# Altium PCB L50T-MAU.PcbDoc (part 1 of 2)
Units mil, origin at the board's own origin, x right, y up, seen from the top; angles counter-clockwise.
Board outline 6702.94 x 9262 mil, 2 copper layers (Top Layer, Bottom Layer); 116 components, 86 nets, 377 pads, 320 vias.
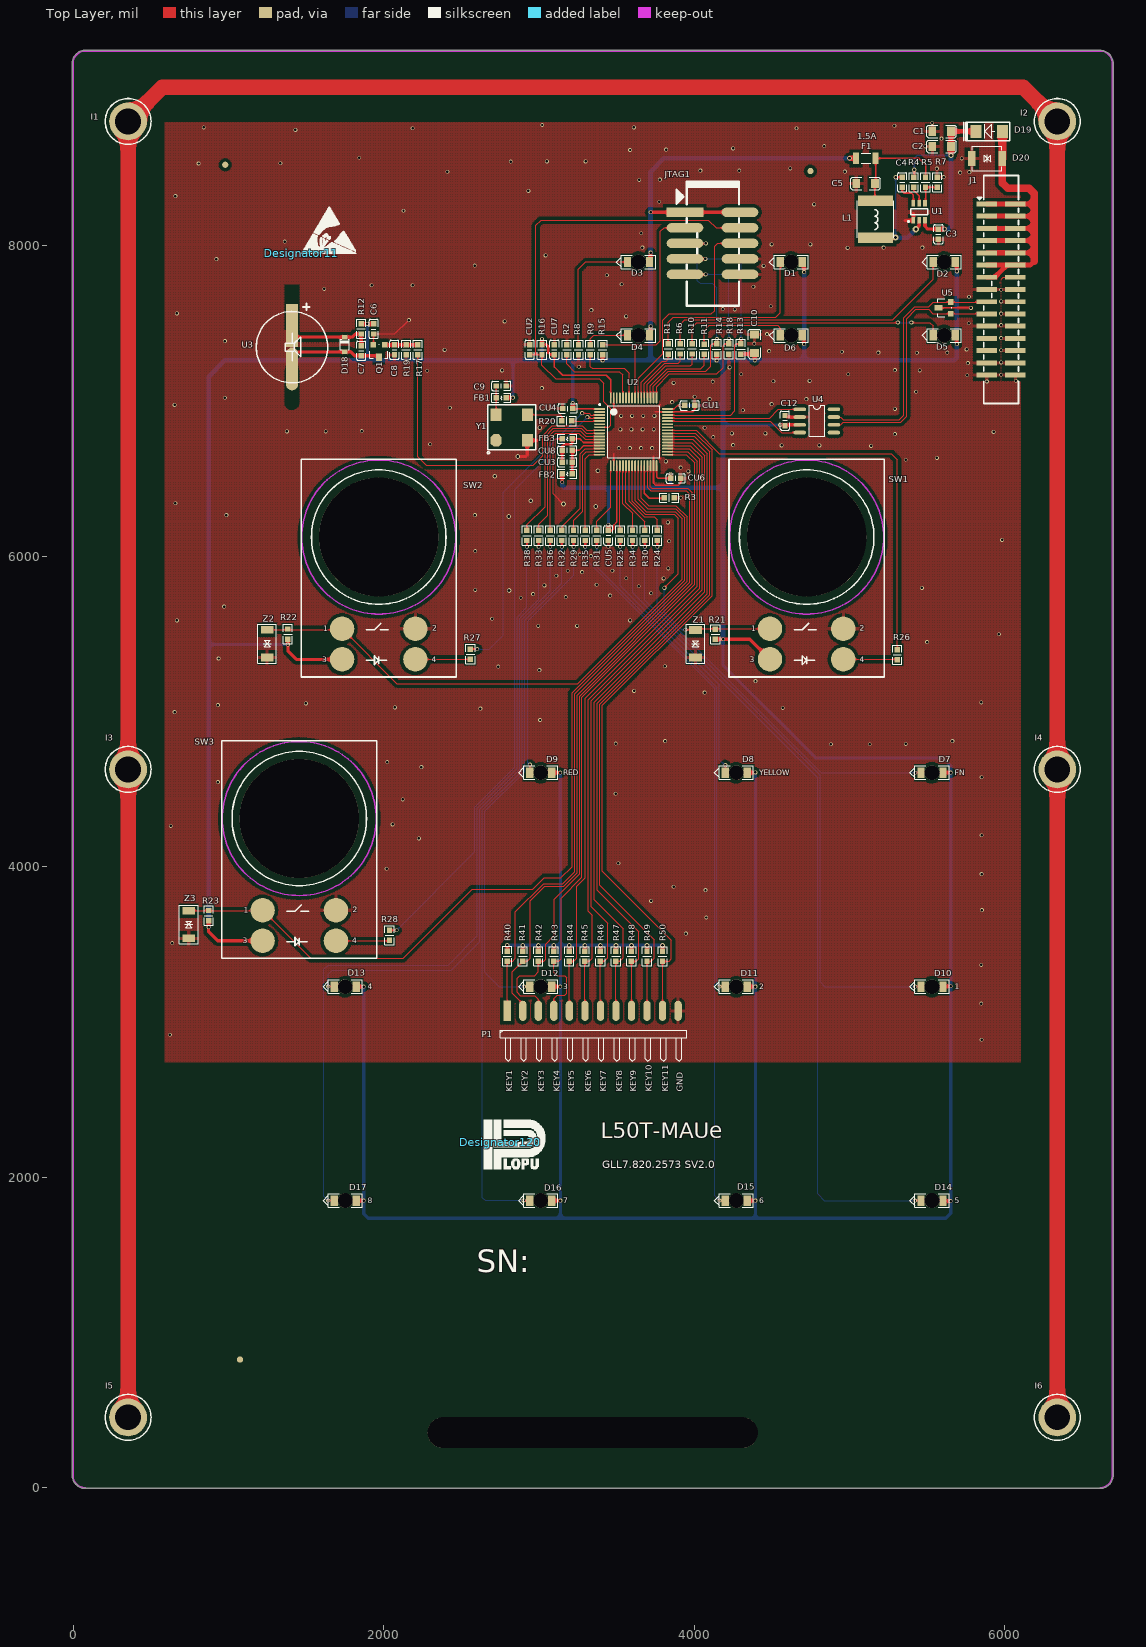
[diagram p0: Top Layer view]
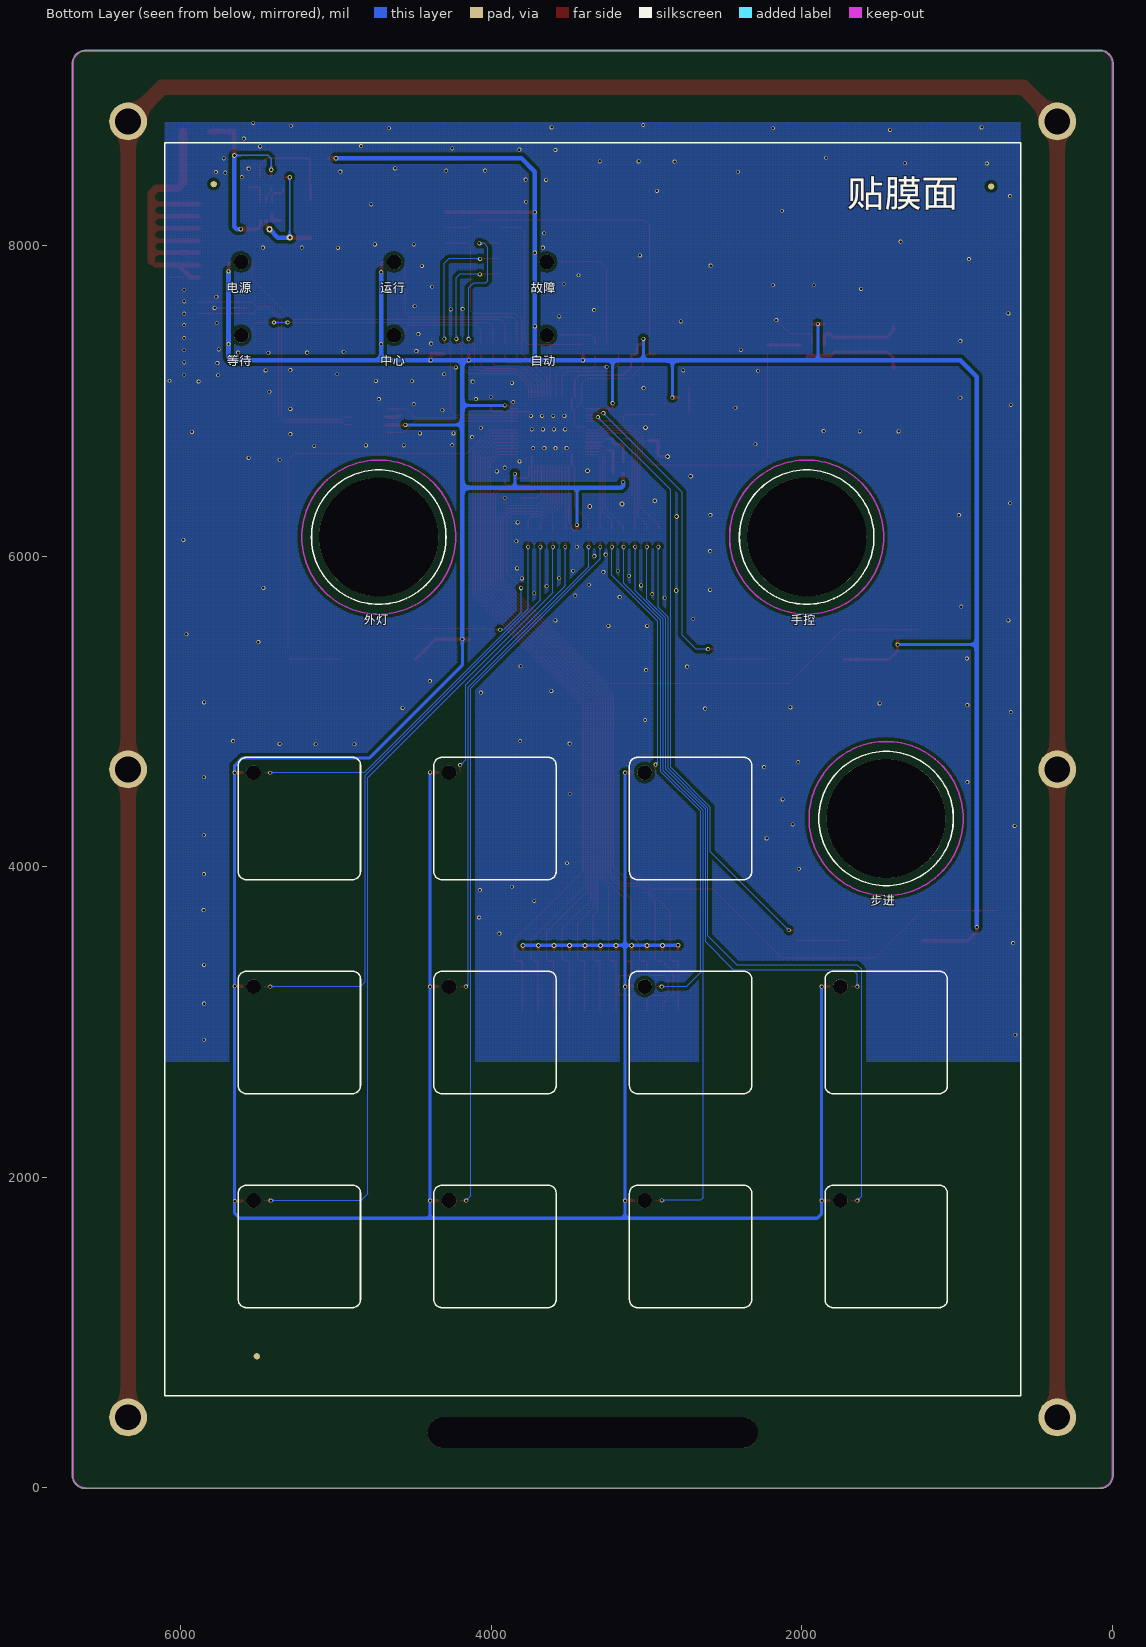
[diagram p1: Bottom Layer view, seen from below]

## Layer stack, top to bottom
Top Solder: solder mask 0.4, Solder Resist, Dk 3.5
Top Layer: signal copper 1.4
Dielectric1: dielectric 12.6, FR-4, Dk 4.8
Bottom Layer: signal copper 1.4
Bottom Solder: solder mask 0.4, Solder Resist, Dk 3.5

## Board outline
-5.01,78.74 ccw(c78.74,78.74) 78.74,-5.01 6614.17,-5.01 ccw(c6614.17,78.74) 6697.93,78.74 6697.93,9173.23 ccw(c6692.91,9173.23) 6697.93,9173.26 cw(c6614.17,9173.23) 6697.93,9173.23 cw(c6692.91,9173.23) 6697.93,9173.23 6697.93,9173.26 ccw(c6614.17,9173.23) 6614.17,9256.98 78.74,9256.98 ccw(c78.74,9173.23) -5.01,9173.23

## Design rules (kind name [scope] priority, off if disabled: settings)
Clearance Clearance_U2 [InComponent('U2')] p1: gap=7
Clearance Clearance_U3 [InComponent('U3')] p2: gap=7
Clearance Clearance_poly [InPolygon] p3: gap=20
Clearance [All] p4: gap=8
ComponentClearance [All] p1: gap=6 collisioncheckmode=3 verticalgap=6 showdistances=FALSE
DiffPairsRouting [All] p1: maxlimit=10 minlimit=10 mostfreqgap=10 toplayer_minwidth=8 toplayer_maxwidth=15 toplayer_prefwidth=15 bottomlayer_minwidth=8 bottomlayer_maxwidth=15 bottomlayer_prefwidth=15 maxuncoupledlength=500
HoleSize [All] p1: absolutevalues=TRUE maxlimit=3000 minlimit=1 maxpercent=80.000 minpercent=20.000
HoleToHoleClearance [All] p1: gap=6 allowstackedmicrovias=TRUE
MinimumSolderMaskSliver [All] p1: minsoldermaskwidth=0
PlaneConnect [InNet('V3.3')] p1: planeconnectstyle=Direct reliefexpansion=20 reliefentries=4 reliefconductorwidth=10 reliefairgap=10
PlaneConnect PlaneConnect_DGND [All] p2: planeconnectstyle=Relief reliefexpansion=20 reliefentries=4 reliefconductorwidth=20 reliefairgap=20
PolygonConnect PolygonConnect_via [isvia] p1: connectstyle=Direct reliefconductorwidth=10 reliefentries=4 polygonreliefangle="90 Angle" airgapwidth=10
PolygonConnect [All] p2: connectstyle=Relief reliefconductorwidth=20 reliefentries=4 polygonreliefangle="90 Angle" airgapwidth=20
RoutingVias [All] p1: holewidth=28 width=50 viastyle="Through Hole" minholewidth=16 minwidth=25 maxholewidth=30 maxwidth=60
SilkToSilkClearance [All] p1: silktosilkclearance=0
SilkToSolderMaskClearance [IsPad] p1: minsilkscreentomaskgap=0 clearancetoexposedcopper=TRUE
SolderMaskExpansion [All] p1: expansion=4
Width [All] p1: maxlimit=400 minlimit=6 preferedwidth=10
22 further rules are at their usual default settings.

## Classes and differential pairs
differential pair DifferentialPair_STM32CAN: +CAN_R -CAN_T
differential pair DifferentialPair_CAN: +CAN0_H -CAN0_L

## Components (designator, comment, footprint, x,y, rotation, side; value= is the part's Value field where it differs from the comment)
C1 "1206-16V-10UF-X5R-K" 1206C#1 5534,8735 r0 top
C2 "1206-16V-10UF-X5R-K" 1206C#2 5594,8637 r0 top
C3 "0603-50V-0.1UF-X7R-K" 0603C#1 5573,8073 r270 top
C4 "0603-50V-0.1UF-X7R-K" 0603C#1 5340,8407.5 r270 top
C5 "1206-10V-47UF-Y5V-M" 1206C#2 5104,8399 r0 top
C6 "0603-50V-0.1UF-X7R-K" 0603C#2 1935,7495 r270 top
C7 "0603-50V-0.1UF-X7R-K" 0603C#2 1855,7355 r270 top
C8 "0603-50V-0.1UF-X7R-K" 0603C#2 2070,7295 r90 top
C9 "0603-50V-1NF-X7R-K" 0603c 2725,7095 r0 top
C10 "1206-16V-10UF-X5R-K" 1206C#2 4389,7367 r270 top
C12 "0603-50V-0.1UF-X7R-K" 0603C#2 4585,6840 r90 top
CU1 "0603-50V-0.1UF-X7R-K" 0603C#2 4002.91,6970 r180 top
CU2 "0603-50V-0.1UF-X7R-K" 0603C#2 2939.91,7362 r270 top
CU3 "0603-50V-0.01UF-X7R-K" 0603C#2 3215,6605 r180 top
CU4 "0603-50V-0.1UF-X7R-K" 0603C#2 3152.91,6950 r0 top
CU5 "0603-50V-0.1UF-X7R-K" 0603C#2 3447.91,6100 r90 top
CU6 "0603-50V-0.1UF-X7R-K" 0603C#2 3912.91,6500 r180 top
CU7 "0603-50V-0.1UF-X7R-K" 0603C#2 3099.91,7362 r270 top
CU8 "0603-50V-0.1UF-X7R-K" 0603C#2 3215,6680 r180 top
D1 "Blue" 1206LED-B 4625.98,7893.7 r0 top locked
D2 "Red" 1206LED-B 5610.24,7893.7 r0 top locked
D3 "Green" 1206LED-B 3641.73,7893.7 r0 top locked
D4 "Red" 1206LED-B 3641.73,7421.26 r0 top locked
D5 "Blue" 1206LED-B 5610.24,7421.26 r0 top locked
D6 "Blue" 1206LED-B 4625.98,7421.26 r0 top locked
D7 "Blue" LED-KEY 5531.5,4604.72 r180 bottom locked
D8 "Blue" LED-KEY 4271.65,4604.72 r180 bottom locked
D9 "Blue" LED-KEY 3011.81,4604.72 r180 bottom locked
D10 "Blue" LED-KEY 5531.5,3226.77 r180 bottom locked
D11 "Blue" LED-KEY 4271.65,3226.77 r180 bottom locked
D12 "Blue" LED-KEY 3011.81,3226.77 r180 bottom locked
D13 "Blue" LED-KEY 1751.97,3226.77 r180 bottom locked
D14 "Blue" LED-KEY 5531.5,1848.82 r180 bottom locked
D15 "Blue" LED-KEY 4271.65,1848.82 r180 bottom locked
D16 "Blue" LED-KEY 3011.81,1848.82 r180 bottom locked
D17 "Blue" LED-KEY 1751.97,1848.82 r180 bottom locked
D18 "1N4148" SOD-323 1750,7410 r270 top
D19 "SS14" SMA 5900,8735 r180 top
D20 "SMBJ15CA" SMB-TVS#1 5788,8560 r0 top
Designator11 "Comment" ESD-9 1470,7949 r0 top
Designator120 "Comment" LOPU_LOGO 2751,2225 r0 top
F1 "贴片1206/nSMD035（台湾陆海）" 1206F 5106,8562 r180 top
FB1 "0603 31@100MHz" 0603L 2725,7020 r0 top
FB2 "0603 31@100MHz" 0603L 3150,6530 r0 top
FB3 "0603 31@100MHz" 0603L 3150,6755 r0 top
I1 "PCB-M3" PADS_M3 354.33,8799.21 r0 top locked
I2 "PCB-M3" PADS_M3 6338.58,8799.21 r0 top
I3 "PCB-M3" PADS_M3 354.33,4625.98 r0 top locked
I4 "PCB-M3" PADS_M3 6338.58,4625.98 r0 top locked
I5 "PCB-M3" PADS_M3 354.33,452.76 r0 top locked
I6 "PCB-M3" PADS_M3 6338.58,452.76 r0 top locked
J1 "Header15x2_T" IDC-30-2.0T 5976.5,7716.52 r0 top locked
JTAG1 "Header 5X2" IDC-10-SMT 4118,8014 r0 top
L1 "贴片6045功率电感 3.3uH 5A" L-6045 5167,8169 r180 top
P1 "Header 12H" XPHD101-12-A01 3346.46,3070.87 r0 top locked
Q1 "8050" SOT-23 1932,7359.46 r0 top
R1 "0603-680-1%" 0603R#1 3832.91,7300.91 r90 top
R2 "0603-10K-1%" 0603R#1 3179.91,7362 r270 top
R3 "0603-10K-1%" 0603R#1 3872.91,6375 r180 top
R4 "0603-10K-1%" 0603R#2 5415,8407.5 r90 top
R5 "0603-33.2K-1%" 0603R#1 5490,8440 r270 top
R6 "0603-680-1%" 0603R#1 3910,7301 r90 top
R7 "0603-10K-1%" 0603R#2 5565,8407.5 r90 top
R8 "0603-680-1%" 0603R#1 3255,7297 r90 top
R9 "0603-680-1%" 0603R#1 3331,7297 r90 top
R10 "0603-680-1%" 0603R#1 3987,7301 r90 top
R11 "0603-680-1%" 0603R#1 4064,7300 r90 top
R12 "0603-0-1%" 0603R#1 1855,7430 r90 top
R13 "0603-10K-1%" 0603R#1 4300.91,7365.91 r270 top
R14 "0603-10K-1%" 0603R#1 4144.91,7365.91 r270 top
R15 "0603-10K-1%" 0603R#1 3409.91,7362 r270 top
R16 "0603-10K-1%" 0603R#1 3019.91,7297 r90 top
R17 "0603-4.7K-1%" 0603R#1 2220,7295 r90 top
R18 "0603-10K-1%" 0603R#1 4223.54,7300.91 r90 top
R19 "0603-3.3K-1%" 0603R#1 2145,7295 r90 top
R20 "0603-22-1%" 0603R#1 3212.91,6870 r180 top
R21 "0603-680-1%" 0603R#1 4136.91,5529 r270 top
R22 "0603-680-1%" 0603R#1 1382.91,5530 r270 top
R23 "0603-680-1%" 0603R#1 872.91,3717 r270 top
R24 "0603-680-1%" 0603R#1 3762.91,6165 r270 top
R25 "0603-680-1%" 0603R#1 3522.91,6165 r270 top
R26 "0603-680-1%" 0603R#1 5307.91,5397 r270 top
R27 "0603-680-1%" 0603R#1 2558.91,5401 r270 top
R28 "0603-680-1%" 0603R#1 2037.91,3590 r270 top
R29 "0603-680-1%" 0603R#1 3222.91,6165 r270 top
R30 "0603-680-1%" 0603R#1 3682.91,6165 r270 top
R31 "0603-680-1%" 0603R#1 3372.91,6165 r270 top
R32 "0603-680-1%" 0603R#1 3147.91,6165 r270 top
R33 "0603-680-1%" 0603R#1 2997.91,6165 r270 top
R34 "0603-680-1%" 0603R#1 3602.91,6165 r270 top
R35 "0603-680-1%" 0603R#1 3297.91,6165 r270 top
R36 "0603-680-1%" 0603R#1 3072.91,6165 r270 top
R38 "0603-680-1%" 0603R#1 2922.91,6165 r270 top
R40 "0603-10K-1%" 0603R#1 2796.46,3456 r270 top
R41 "0603-10K-1%" 0603R#1 2896.48,3455 r270 top
R42 "0603-10K-1%" 0603R#1 2996.5,3455 r270 top
R43 "0603-10K-1%" 0603R#1 3095.99,3455 r270 top
R44 "0603-10K-1%" 0603R#1 3196.02,3455 r270 top
R45 "0603-10K-1%" 0603R#1 3296.04,3455 r270 top
R46 "0603-10K-1%" 0603R#1 3396.06,3455 r270 top
R47 "0603-10K-1%" 0603R#1 3496.08,3455 r270 top
R48 "0603-10K-1%" 0603R#1 3596.1,3455 r270 top
R49 "0603-10K-1%" 0603R#1 3696.12,3455 r270 top
R50 "0603-10K-1%" 0603R#1 3796.15,3455 r270 top
SW1 "SW-DPST" J-19-471 4724.41,6122.05 r180 bottom locked
SW2 "SW-DPST" J-19-471 1968.5,6122.05 r180 bottom locked
SW3 "SW-DPST" J-19-471 1456.69,4309.45 r180 bottom locked
U1 "TPS563200" TSOT23-6 5449,8217 r270 top
U2 "STM32F103R8T6" STM-LQFP64_N 3610,6800 r0 top
U3 "BUZZER" "BUZZ-.28/.46 -SMT" 1410,7485 r270 top locked
U4 "SN65HVD232" SO-8 4900,6945 r180 top
U5 "PESD5V0S2BT" SOT-23 5653,7636 r270 top
Y1 "HXO-36A8.00000W" XTAL-C 2725,6745 r0 top
Z1 "SMBJ5.0CA" SMB-TVS#2 4007.91,5435 r270 top
Z2 "SMBJ5.0CA" SMB-TVS#2 1249.91,5436 r270 top
Z3 "SMBJ5.0CA" SMB-TVS#2 744.91,3627 r270 top

## Footprints (in the part's own frame and the unit in brackets; to place one, negate y for a bottom-side part, rotate by r counter-clockwise, add the part's x,y. Pads: shape width x height; smd on the part's side, far side on the other; paste and mask are expansions set on the pad)
0603C#1 [mil]
  rect 35x35 smd: 1(-32.5,0) 2(32.5,0)
  silkscreen extent -62,-29 62,30, body extent -31,-16 32,16, height 12
0603C#2 [mil]
  rect 35x35 smd: 1(0,0) 2(65,0)
  silkscreen extent -29,-29 94,30
0603c [mil]
  rect 35x35 smd: 1(0,0) 2(65,0)
  silkscreen extent -29,-29 94,30
0603L [mil]
  rect 35x35 smd: 1(0,0) 2(65,0)
  silkscreen extent -29,-29 94,30
0603R#1 [mil]
  rect 35x35 smd: 1(0,0) 2(65,0)
  silkscreen extent -29,-30 94,29
0603R#2 [mil]
  rect 35x35 smd: 1(-32.5,0) 2(32.5,0)
  silkscreen extent -62,-29 62,30
1206C#1 [mil]
  rect 50x60 smd: 1(0,0) 2(120,0)
  silkscreen extent -35,-40 155,40
1206C#2 [mil]
  rect 50x60 smd: 1(-60,0) 2(60,0)
  silkscreen extent -95,-40 95,40
1206F [mm]
  rect 1x1.85 smd: 1(-1.6,0) 2(1.6,0)
  silkscreen extent -0.8,-0.82 0.8,0.82, body extent -1.75,-0.9 1.75,0.9, height 0.9
1206LED-B [mm]
  round 2.4 hole 2.4: 0(0,0)
  rect 1.2x1.7 smd: 1(1.8,0) 2(-1.8,0)
  silkscreen extent -3.61,-1.1 2.8,1.1
"BUZZ-.28/.46 -SMT" [mil]
  rect 275.59x80 smd: 1(0,0)
  oval 275.59x80 smd: 2(280,0)
  silkscreen extent -139,-230 370,230
ESD-9 [mil]
  silkscreen extent 0,0 354,302
IDC-10-SMT [mm]
  rect 6x1.524 smd: 1(-4.5,5.08)
  oval 6x1.524 smd: 2(4.5,5.08) 3(-4.5,2.54) 4(4.5,2.54) 5(-4.5,0) 6(4.5,0) 7(-4.5,-2.54) 8(4.5,-2.54) 9(-4.5,-5.08) 10(4.5,-5.08)
  silkscreen extent -5.88,-10.21 4.33,10.06
IDC-30-2.0T [mm]
  rect 3.365x0.8 smd: 1(-2.349,14) 2(2.35,14) 3(-2.349,12) 4(2.35,12) 5(-2.349,10) 6(2.35,10) 7(-2.349,8) 8(2.35,8) 9(-2.349,6) 10(2.35,6) 11(-2.349,4) 12(2.35,4) 13(-2.349,2) 14(2.35,2) 15(-2.349,0) 16(2.35,0) 17(-2.349,-2) 18(2.35,-2) 19(-2.349,-4) 20(2.35,-4) 21(-2.349,-6) 22(2.35,-6) 23(-2.349,-8) 24(2.35,-8) 25(-2.349,-10) 26(2.35,-10) 27(-2.349,-12) 28(2.35,-12) 29(-2.349,-14) 30(2.35,-14)
  silkscreen extent -3.91,-18.65 2.85,18.65
J-19-471 [mm]
  round 19.5 hole 19.5: 0(0,0)
  round 4 smd far side: 1(6,-15) 2(-6,-15) 3(6,-20) 4(-6,-20)
  silkscreen extent -11,-11 11,11
L-6045 [mm]
  rect 5.7x1.7 smd: 1(0,3) 2(0,-3)
  Top Layer pour cut-out: -3,-3 -3,3 3,3 3,-3
  silkscreen extent -3,-3 3,3
LED-KEY [mm] "MAU-LED"
  round 2.4 hole 2.4: 0(0,0)
  rect 1.2x1.7 smd far side: 1(-1.8,0) 2(1.8,0)
  silkscreen extent -2.49,-17.51 17.51,2.49
LOPU_LOGO [mil]
  silkscreen extent -105,-170 291,146
PADS_M3 [mm]
  round 6.2 hole 4.22: 1(0,0)
  silkscreen extent -3.75,-3.75 3.75,3.75
SMA [mil]
  rect 70x85 smd: 1(-85,0) 2(85,0)
  silkscreen extent -132,-60 165,60
SMB-TVS#1 [mm]
  rect 1.27x2.5 smd: 1(0,0) 2(5,0)
  silkscreen extent 0.1,-2 4.9,2, body extent -0.29,-1.97 5.29,1.98, height 2.6
SMB-TVS#2 [mm] "SMBJ*CA"
  rect 1.27x2.1 smd: 1(-2.261,0) 2(2.261,0)
  silkscreen extent -3.18,-1.52 3.18,1.52
SO-8 [mil]
  oval 80x24 smd: 1(220,0) 2(220,50) 3(220,100) 4(220,150) 5(0,150) 6(0,100) 7(0,50) 8(0,0)
  silkscreen extent 60,-25 160,175
SOD-323 [mil]
  rect 28x36 smd: 1(95,0) 2(0,0)
  silkscreen extent 13,-30 83,30
SOT-23 [mil]
  rect 36x36 smd: 1(75,0) 2(0,0)
  rect 36x50 smd: 3(38,-80)
  silkscreen extent -20,-85 95,5
STM-LQFP64_N [mm] "Thin QFP, 64-Leads, Body 10x10mm, Pitch 0.5mm, IPC Medium Density"
  oval 1.8x0.3 smd: 1(-5.55,3.75) 2(-5.55,3.25) 3(-5.55,2.75) 4(-5.55,2.25) 5(-5.55,1.75) 6(-5.55,1.25) 7(-5.55,0.75) 8(-5.55,0.25) 9(-5.55,-0.25) 10(-5.55,-0.75) 11(-5.55,-1.25) 12(-5.55,-1.75) 13(-5.55,-2.25) 14(-5.55,-2.75) 15(-5.55,-3.25) 16(-5.55,-3.75) 33(5.55,-3.75) 34(5.55,-3.25) 35(5.55,-2.75) 36(5.55,-2.25) 37(5.55,-1.75) 38(5.55,-1.25) 39(5.55,-0.75) 40(5.55,-0.25) 41(5.55,0.25) 42(5.55,0.75) 43(5.55,1.25) 44(5.55,1.75) 45(5.55,2.25) 46(5.55,2.75) 47(5.55,3.25) 48(5.55,3.75)
  oval 0.3x1.8 smd: 17(-3.75,-5.55) 18(-3.25,-5.55) 19(-2.75,-5.55) 20(-2.25,-5.55) 21(-1.75,-5.55) 22(-1.25,-5.55) 23(-0.75,-5.55) 24(-0.25,-5.55) 25(0.25,-5.55) 26(0.75,-5.55) 27(1.25,-5.55) 28(1.75,-5.55) 29(2.25,-5.55) 30(2.75,-5.55) 31(3.25,-5.55) 32(3.75,-5.55) 49(3.75,5.55) 50(3.25,5.55) 51(2.75,5.55) 52(2.25,5.55) 53(1.75,5.55) 54(1.25,5.55) 55(0.75,5.55) 56(0.25,5.55) 57(-0.25,5.55) 58(-0.75,5.55) 59(-1.25,5.55) 60(-1.75,5.55) 61(-2.25,5.55) 62(-2.75,5.55) 63(-3.25,5.55) 64(-3.75,5.55)
  silkscreen extent -5.67,-4.25 4.25,4.57, body extent -5,-5 5,5, height 1.6
TSOT23-6 [mm]
  rect 1.1x0.6 smd: 1(1.4,-0.95) 2(1.4,0) 3(1.4,0.95) 4(-1.4,0.95) 5(-1.4,0) 6(-1.4,-0.95)
  silkscreen extent -0.5,-1.87 1.72,1.4
XPHD101-12-A01 [mm]
  rect 1.2x3.3 smd: 1(-13.97,0)
  oval 1.2x3.3 smd: 2(-11.43,0) 3(-8.89,0) 4(-6.35,0) 5(-3.81,0) 6(-1.27,0) 7(1.27,0) 8(3.81,0) 9(6.35,0) 10(8.89,0) 11(11.43,0) 12(13.97,0)
  silkscreen extent -15.09,-8.23 15.39,-3.15
XTAL-C [mm]
  oct 1.8x2 smd: 1(0,0)
  rect 1.8x2 smd: 2(5.08,0) 3(5.08,4.2) 4(0,4.2)
  silkscreen extent -1.45,-2.21 6.48,5.84

## Part data
C1 C2 C3 C4 C5 C6 C7 C8 C10 C12 CU1 CU2 CU3 CU4 CU5 CU6 CU7 CU8: library part Cap, "Capacitor"
C9: library part CAP, "Capacitor"
D1 D2 D3 D4 D5 D6 D7 D8 D9 D10 D11 D12 D13 D14 D15 D16 D17: library part LED
D18: library part "Diode 1N4148", "High Conductance Fast Diode"
D19: library part DIODE, "Diode"
D20 Z1 Z2 Z3: library part TVSC
F1: library part "Fuse 1", "Fuse"
FB1 FB2 FB3 L1: library part Inductor, "Inductor"
I1 I2 I3 I4 I5 I6: library part PCB-M
J1: library part Header15x2
JTAG1: "Header, 5-Pin, Dual row"
P1: "Header, 12-Pin, Right Angle"
Q1: library part NPN, "NPN Transistor"
R1 R2 R3 R4 R5 R6 R7 R8 R9 R10 R11 R12 R13 R14 R15 R16 R17 R18 R19 R20 R21 R22 R23 R24 R25 R26 R27 R28 R29 R30 R31 R32 R33 R34 R35 R36 R38 R40 R41 R42 R43 R44 R45 R46 R47 R48 R49 R50: library part Res1, "Resistor"
SW1 SW2 SW3: "Double-Pole, Single-Throw Switch"
U1: library part TPS562200
U2: "LQFP64"
U3: "TMB12A03"
U5: library part NUP2105L, "TVS protect"
Y1: library part osc

## Free pads (board coordinates)
  round 40 smd far side: 0(780,8380) 0(5510,846) 0(5787,8395)
  round 40 smd: 0(980,8520) 0(1075,825) 0(4749,8479)
  oval 2125.98x196.85 hole 196.85 slot 2125.98 at 0 deg: 0(3346.46,354.33)

## Via types
v1: diameter 25, hole 16, Top Layer to Bottom Layer, tented both sides, 293 vias
v2: diameter 30, hole 18, Top Layer to Bottom Layer, tented both sides, 24 vias
v3: diameter 40, hole 20, Top Layer to Bottom Layer, tented both sides, 2 vias
v4: diameter 28, hole 16, Top Layer to Bottom Layer, tented both sides, 1 vias

## Nets (pads, with @x,y where several pads share a name; then routed paths per layer and width w, separated by ;. In a path a pad name is that pad's centre, name@x,y a point inside that pad or via, vN(x,y) a via of type N, cw(c..) or ccw(c..) an arc to the next point about the centre after c; other vN are vias at no path point)
AGND: CU3.2 CU8.2 FB3.2 U2.12 | length 389.7
  Top Layer w10: FB3.2@3215,6755 3262.91,6755 3286.81,6731.1 U2.12@3391.5,6731.1
  Top Layer w15: CU3.2@3150,6605 CU8.2@3150,6680 3150,6707.09 3162.91,6720 3207.91,6720 3215,6727.09 FB3.2@3215,6755
BEEP: R17.1 U2.8 | length 2042.7
  Top Layer w8: R17.1@2220,7295 2220,6637.91 2272.91,6585 2962.91,6585 3023.91,6646 3023.91,6775.3 3086.62,6838 3279.21,6838 3307.37,6809.84 U2.8@3391.5,6809.84
CAN0_H: J1.17 U4.7 U5.2 | length 1673.4
  Top Layer w8: U4.7@4900,6895 4944,6895 4960,6879 5321.91,6879 5349.91,6907 5349.91,7535.96 5420.46,7606.5 5509.41,7606.5 5538.91,7636 U5.2@5653,7636 5882.22,7636 J1.17@5884,7637.78
CAN0_L: J1.19 U4.6 U5.1 | length 1672.6
  Top Layer w8: U4.6@4900,6845 4944,6845 4960,6861 5329.37,6861 5367.91,6899.54 5367.91,7528.5 5427.91,7588.5 5509.41,7588.5 5536.91,7561 U5.1@5653,7561 5882.04,7561 J1.19@5884,7559.04
CAN1_H: J1.23
CAN1_L: J1.25
CAN_R: U2.44 U4.4 | length 882.1
  Top Layer w8: U2.44@3828.5,6868.9 4489.02,6868.9 4562.91,6795 U4.4@4680,6795
CAN_T: U2.45 U4.1 | length 874.9
  Top Layer w8: U2.45@3828.5,6888.58 4486.5,6888.58 4542.91,6945 U4.1@4680,6945
DGND: C1.1 C2.1 C3.2 C5.1 C6.2 C8.1 C9.2 C10.1 C12.2 CU1.1 CU2.1 CU4.1 CU5.1 CU6.1 CU7.1 D20.1 FB3.1 J1.14 J1.15 J1.16 J1.18 J1.20 J1.21 J1.22 J1.24 J1.26 J1.27 J1.28 J1.29 J1.30 JTAG1.8 JTAG1.10 P1.12 Q1.2 R2.1 R3.1 R7.2 R8.1 R18.1 R19.1 SW1.2 SW2.2 SW3.2 U1.1 U2.18 U2.31 U2.47 U2.63 U4.2 U5.3 Y1.2 Z1.2 Z2.2 Z3.2 | length 2430.3
  Top Layer w8: Q1.2@1932,7359.46 1935,7362.46 C6.2@1935,7430 2073,7430 v1(2163,7520) ; FB3.1@3150,6755 3107.91,6755 3092.91,6740 3092.91,6400 v2(3157.91,6335) ; 3773.6,6636.4 3784.61,6625.39 3784.61,6624 ; 3773.6,6963.6 3783.02,6973.02 ; 3785.4,6975.4 3785.4,6977.48 ; 5978.76,7781.91 5992.11,7795.26 J1.14@6069,7795.26
  Top Layer w10: U2.18@3482.05,6581.5 3482.05,6658.13 ; 3482.05,6937.13 U2.63@3482.05,7018.5 ; 3737.95,6643.05 U2.31@3737.95,6581.5 3737.95,6469.96 3752.91,6455 3897.91,6455 3912.91,6470 CU6.1@3912.91,6500 ; 3747.96,6927.95 U2.47@3828.5,6927.95 3990.87,6927.95 4002.91,6940 CU1.1@4002.91,6970 ; U5.3@5573,7598 v1(5782,7598)
  Top Layer w20: v2(2863.91,6641) 2915.91,6641 2925,6650.09 Y1.2@2925,6745 2989.17,6745 ; C12.2@4585,6905 4595,6895 U4.2@4680,6895 ; 5357.12,8161.88 U1.1@5411.6,8161.88 5411.6,8205.94 5411,8206.54
  other v1: 5851,2885 623.83,2917 5849,3117.09 5849,3367.09 638.83,3507 3947,3568 4077.91,3672 5852.91,3720 3723,3779 4072.91,3848 3867,3870 5850.91,3952.09 2019,3986 3512,4021 2227,4181 5850.91,4202.09 628.83,4262 2057.91,4271 2122.91,4433 3494,4469 932.91,4544 5851,4575 2242.91,4641 2022.91,4673 4880.91,4788 5130.91,4788 5363,4790 3495,4792 3812.91,4808 5662.91,4808 3007.91,4944 653.83,4995 2622.91,5017 4570.83,5022 2072.91,5025 932.91,5040 1499,5051 5849,5057.09 4067,5120 3613,5131 4395,5195 3003,5265 2737.91,5288 3810.91,5290.09 937,5340 5499.91,5445.91 5962.91,5496 2995.83,5550 3245.83,5550 668.83,5585 3587,5585 2699,5596 972.91,5674 2883,5731 3172.91,5736 3459,5745 2962.91,5755 3722.91,5760 2589.91,5781.91 5467,5795 3643,5805 3035,5811 3371,5815 3803,5856 3562.91,5857 3112.91,5873 3277.91,5896 3185.41,5905 3472.91,5905 3832.91,5920 3335.41,6000 3262.91,6009 2589.91,6031.91 3447.91,6060 3837.91,6095 5982.91,6104 3830.41,6216 987.91,6264 2587.91,6264 658.83,6340 3912.91,6375 3962.91,6545 3912.91,6569 3817.91,6609 5363,6620 5562.91,6632 3514.33,6695 3586,6695 3657.67,6695 3729.33,6695 5140,6709 4807,6712 4563,6713 4251,6715 2299,6720 4123,6766 5292.91,6785 4242.91,6790 4459,6790 5927.91,6800 1376.91,6803 1626.91,6803 1859,6805 3524.33,6815 3596,6815 3667.67,6815 3739.33,6815 4067,6826 3529,6902 3600.67,6902 3672.33,6902 3744,6902 4314,6939 5293,6947.91 2427,6955 653.83,6973 4499,6978 3857.91,6991 4099,7011 4723,7011 977.91,7019 4003,7026 5429,7057.91 3019,7081 3867,7115 4120,7123 5885,7124 4510.83,7126 4742.91,7128 6072,7128.59 5759,7164 5977,7167.22 4303,7171 4992,7171 2280.91,7193 2763,7195 5453,7196 5293,7197.91 4228,7215 3257,7219 5763,7243 5977,7247.22 5435,7309 5186,7310 5630,7310 4951,7316 4482,7320 5977,7325.06 2392.91,7328 5755,7331 4387,7368 977.91,7384 5977,7403.8 4469,7429 5977,7487.22 5768,7499 2779,7511 3562,7543 5977,7561.28 668.83,7563 3338,7584 4261,7588 4184,7590 4493,7609 5977,7640.02 5770,7670 5977,7715 1617.91,7720 4381,7734 1922.91,7744 2186,7744 3532.91,7750 3437.91,7808 4447,7869 2587,7870 922.91,7912 3043,7936 4987.91,7984 3667,7986 5220,7986 5470,7986 4499.09,8007 4749.09,8007 1363,8025 3659,8079 2127.91,8224 4772.91,8265 3775,8282 658.83,8318 2932.91,8351 3646,8422 3779,8424 5606.71,8440 5712.91,8470 5772.91,8473 2411,8475 4971,8476 4040,8482 4290,8482 5563,8495 4619,8496 807.91,8528 1335.42,8530 2819,8540 3051.09,8542 3301.09,8542 5723,8561 1843,8565 3587,8615 3819.09,8617 4251,8625 5489,8638 4837.91,8640 5592.91,8688 1431.25,8745 2186.25,8755 4659,8755 841.25,8760 3611.25,8761 5290,8771 3021.25,8776 5532.91,8789.21
  other v2: 2807.91,5778 2805.91,6255 3365.91,6319 2946.91,6356 2715.91,6514 3379.91,6549 3005.91,6827
JTCK: JTAG1.9 R18.2 U2.49 | length 1455
  Top Layer w8: U2.49@3757.64,7018.5 3757.64,7091.76 3838.88,7173 4146,7173 4186,7213 4186,7355 4196.91,7365.91 R18.2@4223.54,7365.91 4223.54,7397.54 v1(4224,7398) ; JTAG1.9@3940.83,7814 v1(4073,7814)
  Bottom Layer w8: v1(4073,7814) 4203,7814 4224,7793 v1(4224,7398)
JTDI: JTAG1.5 R14.1 U2.50 | length 1596.7
  Top Layer w8: U2.50@3737.95,7018.5 3737.95,7094.7 3834.25,7191 4076,7191 4106,7221 4106,7357 4114.91,7365.91 R14.1@4144.91,7365.91 4144.91,7395.91 v1(4146,7397) ; JTAG1.5@3940.83,8014 4075,8014 v1(4076,8013)
  Bottom Layer w8: v1(4076,8013) 4045,8013 4021,7989 4021,7774 4038,7757 4116,7757 4146,7727 v1(4146,7397)
JTDO: JTAG1.6 U2.55 | length 1509.1
  Top Layer w8: U2.55@3639.53,7018.5 3639.53,7143.53 3799,7303 3799,7518 3841,7560 4111,7560 4132,7581 4132,7994 4152,8014 JTAG1.6@4295.17,8014
JTMS: JTAG1.7 R13.1 U2.46 | length 1804.6
  Top Layer w8: U2.46@3828.77,6908 U2.46@3828.5,6908.27 4235.27,6908.27 4262,6935 4262,7359 4268.91,7365.91 R13.1@4300.91,7365.91 4300.91,7397.91 v1(4302,7399) ; JTAG1.7@3940.83,7914 v1(4072,7914)
  Bottom Layer w8: v1(4072,7914) 4275,7914 4302,7887 v1(4302,7399)
JTRST: JTAG1.3 R15.1 U2.56 | length 1649.6
  Top Layer w8: R15.1@3409.91,7362 3602,7362 ; U2.56@3619.84,7018.5 3619.84,7346 ; 3636,7362 ccw(c3635.92,7345.92) 3635.84,7362 ; JTAG1.3@3940.83,8114 3806,8114 3783,8091 3783,7388 3757,7362 3635.84,7362 ; 3602,7362 cw(c3602.92,7345.08) 3603.84,7362 ; 3602,7362 3603.84,7362 ; 3603.84,7362 cw(c3602.92,7345.08) 3619.84,7346 ; 3603.84,7362 3619.84,7362 ; 3619.84,7346 cw(c3635.92,7345.92) 3635.84,7362 ; 3619.84,7346 3619.84,7362 ; 3619.84,7362 3635.84,7362
KEY1: P1.1 R40.2 U2.27 | length 4308.4
  Top Layer w8: P1.1@2796.91,3071.32 P1.1@2796.46,3070.87 R40.2@2796.46,3391 2830.91,3391 2847.91,3408 2847.91,3708 3029.91,3890 3152.91,3890 3229.49,3966.57 3229.49,5111.57 3954.91,5837 3954.91,6253 3882.91,6325 3707.91,6325 3659.21,6373.7 U2.27@3659.21,6581.5
KEY2: P1.2 R41.2 U2.29 | length 4346.5
  Top Layer w8: P1.2@2896.46,3070.87 2896.46,3115.54 2828,3184 2828,3321.52 R41.2@2896.48,3390 2923.91,3390 2942.91,3409 2942.91,3780.37 3036.54,3874 3159.54,3874 3245.49,3959.95 3245.49,5104.95 3970.91,5830.37 3970.91,6397 3948.91,6419 3721.64,6419 3700.36,6440.28 3700.36,6579.72 U2.29@3698.58,6581.5
KEY3: P1.3 R42.2 U2.30 | length 4410.3
  Top Layer w8: P1.3@2996.46,3070.87 2996.46,3144.54 2972,3169 2880,3169 2859,3190 2859,3281 2876,3298 2972,3298 2996.5,3322.5 R42.2@2996.5,3390 3029.91,3390 3043,3403.09 3043,3501 3099,3557 3099,3790.83 3261.49,3953.32 3261.49,5098.32 3986.91,5823.75 3986.91,6406 3957.91,6435 3728.27,6435 3718.27,6445 U2.30@3718.27,6581.5
KEY4: P1.4 R43.2 U2.33 | length 4244.6
  Top Layer w8: P1.4@3096.46,3070.87 3096.46,3149.46 3117,3170 3165,3170 3180,3185 3180,3283 3166,3297 3119,3297 3095.99,3320.01 R43.2@3095.99,3390 3127.91,3390 3142.91,3405 3142.91,3795.91 3277.49,3930.49 3277.49,5091.69 4002.91,5817.12 4002.91,6600 3950.55,6652.36 U2.33@3828.5,6652.36
KEY5: P1.5 R44.2 U2.34 | length 4113.1
  Top Layer w8: P1.5@3196.46,3070.87 3196.02,3071.31 R44.2@3196.02,3390 3222.91,3390 3242.91,3410 3242.91,3873.29 3297.17,3927.55 3297.17,5083.54 4018.91,5805.28 4018.91,6611.84 3958.7,6672.05 U2.34@3828.5,6672.05
KEY6: P1.6 R45.2 U2.35 | length 4131.6
  Top Layer w8: P1.6@3296.46,3070.87 3296.46,3389.58 R45.2@3296.04,3390 3323.91,3390 3342.91,3409 3342.91,3685 3316.86,3711.06 3316.86,5075.39 4034.91,5793.44 4034.91,6623.68 3966.86,6691.73 U2.35@3828.5,6691.73
KEY7: P1.7 R46.2 U2.36 | length 4192
  Top Layer w8: P1.7@3396.46,3070.87 3396.46,3389.6 R46.2@3396.06,3390 3419.91,3390 3442.91,3413 3442.91,3635 3336.54,3741.37 3336.54,5067.23 4050.91,5781.6 4050.91,6635.52 3975.01,6711.42 U2.36@3828.5,6711.42
KEY8: P1.8 R47.2 U2.37 | length 4254.8
  Top Layer w8: P1.8@3496.46,3070.87 3496.46,3389.62 R47.2@3496.08,3390 3519.91,3390 3542.91,3413 3542.91,3600 3356.23,3786.69 3356.23,5059.08 4066.91,5769.76 4066.91,6647.36 3983.17,6731.1 U2.37@3828.5,6731.1
KEY9: P1.9 R48.2 U2.38 | length 4322.3
  Top Layer w8: P1.9@3596.46,3070.87 3596.46,3389.65 R48.2@3596.1,3390 3627.91,3390 3642.91,3405 3642.91,3580 3375.91,3847 3375.91,5050.92 4082.91,5757.92 4082.91,6659.19 3991.32,6750.79 U2.38@3828.5,6750.79
KEY10: P1.10 R49.2 U2.39 | length 4385.8
  Top Layer w8: P1.10@3696.46,3070.87 3696.46,3389.67 R49.2@3696.12,3390 3723.91,3390 3742.91,3409 3742.91,3530 3391.91,3881 3391.91,5044.3 4098.91,5751.3 4098.91,6671.03 3999.47,6770.47 U2.39@3828.5,6770.47
KEY11: P1.11 R50.2 U2.40 | length 4468.1
  Top Layer w8: P1.11@3796.46,3070.87 3796.46,3389.69 R50.2@3796.15,3390 3837.91,3390 3852.91,3405 3852.91,3525 3407.91,3970 3407.91,5037.67 4114.91,5744.67 4114.91,6682.87 4007.63,6790.16 U2.40@3828.5,6790.16
LED_AUTO: R10.1 U2.52 | length 494.5
  Top Layer w8: U2.52@3698.58,7018.5 3698.58,7105.58 3817,7224 3975,7224 3987,7236 R10.1@3987,7301
LED_CENTER: R11.1 U2.51 | length 550.3
  Top Layer w8: U2.51@3718.27,7018.5 3718.27,7097.64 3827.63,7207 4042,7207 4064,7229 R11.1@4064,7300
LED_ERR: R6.1 U2.53 | length 428.6
  Top Layer w8: U2.53@3678.9,7018.5 3678.9,7108.9 3810,7240 3896,7240 3910,7254 R6.1@3910,7301
LED_LOCK: R9.1 U2.58 | length 504.3
  Top Layer w8: R9.1@3331,7297 3331,7219 3342,7208 3551,7208 3580.47,7178.53 U2.58@3580.47,7018.5
LED_RUN: R1.1 U2.54 | length 368.4
  Top Layer w8: U2.54@3659.21,7018.5 3659.21,7120.21 3795,7256 3819,7256 3832.91,7269.91 R1.1@3832.91,7300.91
LED_SW1: R28.1 U2.4 | length 3940.7
  Top Layer w8: R28.1@2037.91,3590 v1(2082.91,3590) ; v1(3312.91,6895) 3319.33,6888.58 U2.4@3391.5,6888.58
  Bottom Layer w8: v1(2082.91,3590) 2587.91,4095 2587.91,4382.51 2843.91,4638.51 2843.91,6426 v1(3312.91,6895)
LED_SW2: R27.1 U2.3 | length 2007
  Top Layer w8: R27.1@2558.91,5401 2601.91,5401 v1(2602.91,5400) ; v1(3277.91,6920) 3278.41,6919.5 3323.06,6919.5 3334.29,6908.27 U2.3@3391.5,6908.27
  Bottom Layer w8: v1(2602.91,5400) 2678.91,5400 2769.91,5491 2769.91,6412 v1(3277.91,6920)
LED_SW3: R26.1 U2.41 | length 2781
  Top Layer w8: U2.41@3828.5,6809.84 4011.98,6809.84 4161.83,6660 5267.91,6660 5307.91,6620 R26.1@5307.91,5397
NetC4_1: C4.1 L1.1 U1.2 | length 780.1
  Top Layer w10: v4(5297.91,8440) C4.1@5340,8440
  Top Layer w20: v3(5427.41,8104.5) 5449,8126.09 U1.2@5449,8161.88
  Top Layer w30: L1.1@5167,8050.89 v3(5297.02,8050.89)
  Bottom Layer w10: v3@5297.91,8050.89 5297.91,8129.94 v4(5297.91,8440)
  Bottom Layer w30: v3(5297.02,8050.89) 5297.91,8050.89 5373.8,8050.89 v3(5427.41,8104.5)
NetC4_2: C4.2 U1.6 | length 160.6
  Top Layer w10: C4.2@5340,8375 5340,8349 5351,8338 5398.91,8338 5411.6,8325.31 U1.6@5411.6,8272.12
NetC5_2: C5.2 F1.1 L1.2 R5.1 | length 703.2
  Top Layer w10: L1.2@5167,8287.11 5164,8290.11 C5.2@5164,8399 C5.2@5168.99,8403.99 ; C5.2@5174.5,8409.5 C5.2@5168.99,8403.99 ; R5.1@5490,8440 5490,8517.91 5445.91,8562 F1.1@5168.99,8562 C5.2@5168.99,8403.99
NetC7_1: C7.1 D18.2 R12.1 U3.1 | length 578.1
  Top Layer w20: U3.1@1410,7485 1410,7452.91 1452.91,7410 D18.2@1750,7410 1797.91,7410 1817.91,7430 R12.1@1855,7430 C7.1@1855,7355
NetC7_2: C7.2 D18.1 Q1.3 U3.2 | length 662.5
  Top Layer w20: U3.2@1410,7205 1410,7277.09 1447.91,7315 D18.1@1750,7315 1787.91,7315 1812.91,7290 C7.2@1855,7290 1959.46,7290 Q1.3@1970,7279.46
NetC8_2: C8.2 Q1.1 R17.2 R19.2 | length 213.2
  Top Layer w20: Q1.1@2007,7359.46 2069.46,7359.46 C8.2@2070,7360 R19.2@2145,7360 R17.2@2220,7360
NetC9_1: C9.1 FB1.1 Y1.4 | length 184.6
  Top Layer w8: Y1.4@2725,6910.35 FB1.1@2725,7020 C9.1@2725,7095
NetD1_2: D1.2 R1.2 | length 1214.7
  Top Layer w8: R1.2@3832.91,7365.91 3832.91,7506.91 3864,7538 4526,7538 4555.12,7567.12 D1.2@4555.12,7893.7
NetD2_2: D2.2 R6.2 | length 1987
  Top Layer w8: R6.2@3910,7366 3910,7492 3939,7521 5278,7521 5539.37,7782.37 D2.2@5539.37,7893.7
NetD3_2: D3.2 R8.2 | length 819.6
  Top Layer w8: R8.2@3255,7362 3255,7846 3302.7,7893.7 D3.2@3570.87,7893.7
NetD4_2: D4.2 R9.2 | length 287.3
  Top Layer w8: R9.2@3331,7362 3331,7400 3353,7422 3570.13,7422 D4.2@3570.87,7421.26
NetD5_2: D5.2 R10.2 | length 1742.6
  Top Layer w8: R10.2@3987,7366 3987,7475 4015,7503 v1@5312,7503 ; v1(5399,7504) 5517,7504 5539.37,7481.63 D5.2@5539.37,7421.26
  Bottom Layer w8: v1(5312,7504) v1(5399,7504)
NetD6_2: D6.2 R11.2 | length 644.9
  Top Layer w8: R11.2@4064,7365 4064,7452 4097,7485 4537,7485 4555.12,7466.88 D6.2@4555.12,7421.26
NetD7_2: D7.2 R24.2 | length 2576.9
  Top Layer w8: v1@5422.28,4604.72 D7.2@5460.63,4604.72
  Top Layer w10: v1(3762.91,6060) R24.2@3762.91,6100
  Bottom Layer w8: v1(3762.91,6060) 3762.91,5660 4818.19,4604.72 5423.28,4604.72 v1(5424,4604)
NetD8_2: D8.2 R25.2 | length 1778.2
  Top Layer w8: D8.2@4200.79,4604.72 v1(4200.79,4653.79)
  Top Layer w10: v1(3522.91,6060) R25.2@3522.91,6100
  Bottom Layer w8: v1(3522.91,6060) 3522.91,5810 4162.91,5170 4162.91,4688 4197.13,4653.79 v1(4200.79,4653.79)
NetD9_2: D9.2 R29.2 | length 1623.7
  Top Layer w8: D9.2@2940.94,4604.72 2942,4605.78 v1(2942,4657)
  Top Layer w10: v1(3222.91,6060) R29.2@3222.91,6100
  Bottom Layer w8: v1(2942,4657) 2927.91,4671.09 2927.91,5580 3222.91,5875 v1(3222.91,6060)
NetD10_2: D10.2 R30.2 | length 3972
  Top Layer w10: v1(3682.91,6060) R30.2@3682.91,6100 ; v1(5423,3227) 5423.23,3226.77 D10.2@5460.63,3226.77
  Bottom Layer w8: v1(3682.91,6060) 3682.91,5715 4811.19,4586.72 4811.19,4566.1 4811,4565.91 4811,3258 4842,3227 v1(5423,3227)
NetD11_2: D11.2 R31.2 | length 3238.3
  Top Layer w8: v1(4163,3226.77) D11.2@4200.79,3226.77
  Top Layer w10: v1(3372.91,6060) R31.2@3372.91,6100
  Bottom Layer w8: v1(3372.91,6060) 3372.91,5930 4146.91,5156 4146.91,3242.86 v1(4163,3226.77)
NetD12_2: D12.2 R32.2 | length 3313.1
  Top Layer w8: v1(2903.23,3226.77) D12.2@2940.94,3226.77
  Top Layer w10: v1(3147.91,6060) R32.2@3147.91,6100
  Bottom Layer w8: v1(2903.23,3226.77) 2745.14,3226.77 2651.91,3320 2651.91,4356 2907.91,4612 2907.91,5585 3147.91,5825 v1(3147.91,6060)
NetD13_2: D13.2 R33.2 | length 3924.1
  Top Layer w8: v1(1641.77,3226.77) D13.2@1681.1,3226.77 ; v1(2997.91,6060) R33.2@2997.91,6100
  Bottom Layer w8: v1(1641.77,3226.77) 1641.77,3305.77 1669,3333 2436.91,3333 2619.91,3516 2619.91,4369.25 2875.91,4625.25 2875.91,5600.63 2997.91,5722.63 v1(2997.91,6060)
NetD14_2: D14.2 R34.2 | length 5384.9
  Top Layer w8: v1(5421.18,1848.82) D14.2@5460.63,1848.82
  Top Layer w10: v1(3602.91,6060) R34.2@3602.91,6100
  Bottom Layer w8: v1(3602.91,6060) 3602.91,5765 4795.19,4572.72 4795,4572.54 4795,1893 4839.18,1848.82 v1(5421.18,1848.82)
NetD15_2: D15.2 R35.2 | length 4647.9
  Top Layer w8: v1(4162,1848.82) D15.2@4200.79,1848.82
  Top Layer w10: v1(3297.91,6060) R35.2@3297.91,6100
  Bottom Layer w8: v1(3297.91,6060) 3297.91,5980.96 4130.91,5147.96 4130.91,1879.91 v1(4162,1848.82)
NetD16_2: D16.2 R36.2 | length 4725.5
  Top Layer w8: v1@2902,1849 2902.18,1848.82 D16.2@2940.94,1848.82 ; v1(3072.91,6060) R36.2@3072.91,6100
  Bottom Layer w8: v1(2902,1850) 2654,1850 2635.91,1868.09 2635.91,4362.63 2891.91,4618.63 2891.91,5594 3072.91,5775 v1(3072.91,6060)
NetD17_2: D17.2 R38.2 | length 5297.3
  Top Layer w8: v1(1642.18,1848.82) D17.2@1681.1,1848.82 ; v1(2922.91,6060) R38.2@2922.91,6100
  Bottom Layer w8: v1(1642.18,1848.82) 1614,1877 1614,3338 1642,3366 2415.91,3366 2603.91,3554 2603.91,4375.88 2859.91,4631.88 2859.91,5607.25 2922.91,5670.25 v1(2922.91,6060)
NetR2_2: R2.2 U2.60 | length 598
  Top Layer w8: R2.2@3179.91,7297 3179.91,7237.09 3229,7188 3519,7188 3541.1,7165.9 U2.60@3541.1,7018.5
NetR3_2: R3.2 U2.28 | length 322.3
  Top Layer w10: U2.28@3679.68,6580.72 U2.28@3678.9,6581.5 3678.9,6404.02 3711.15,6371.76 3804.68,6371.76 R3.2@3807.91,6375